# Altium PCB 大创第一版.pcbdoc
Units mil, origin at the board's own origin, x right, y up, seen from the top; angles counter-clockwise.
Board outline 6890 x 5845 mil, 2 copper layers (Top Layer, Bottom Layer); 17 components, 119 nets, 202 pads, 65 vias.
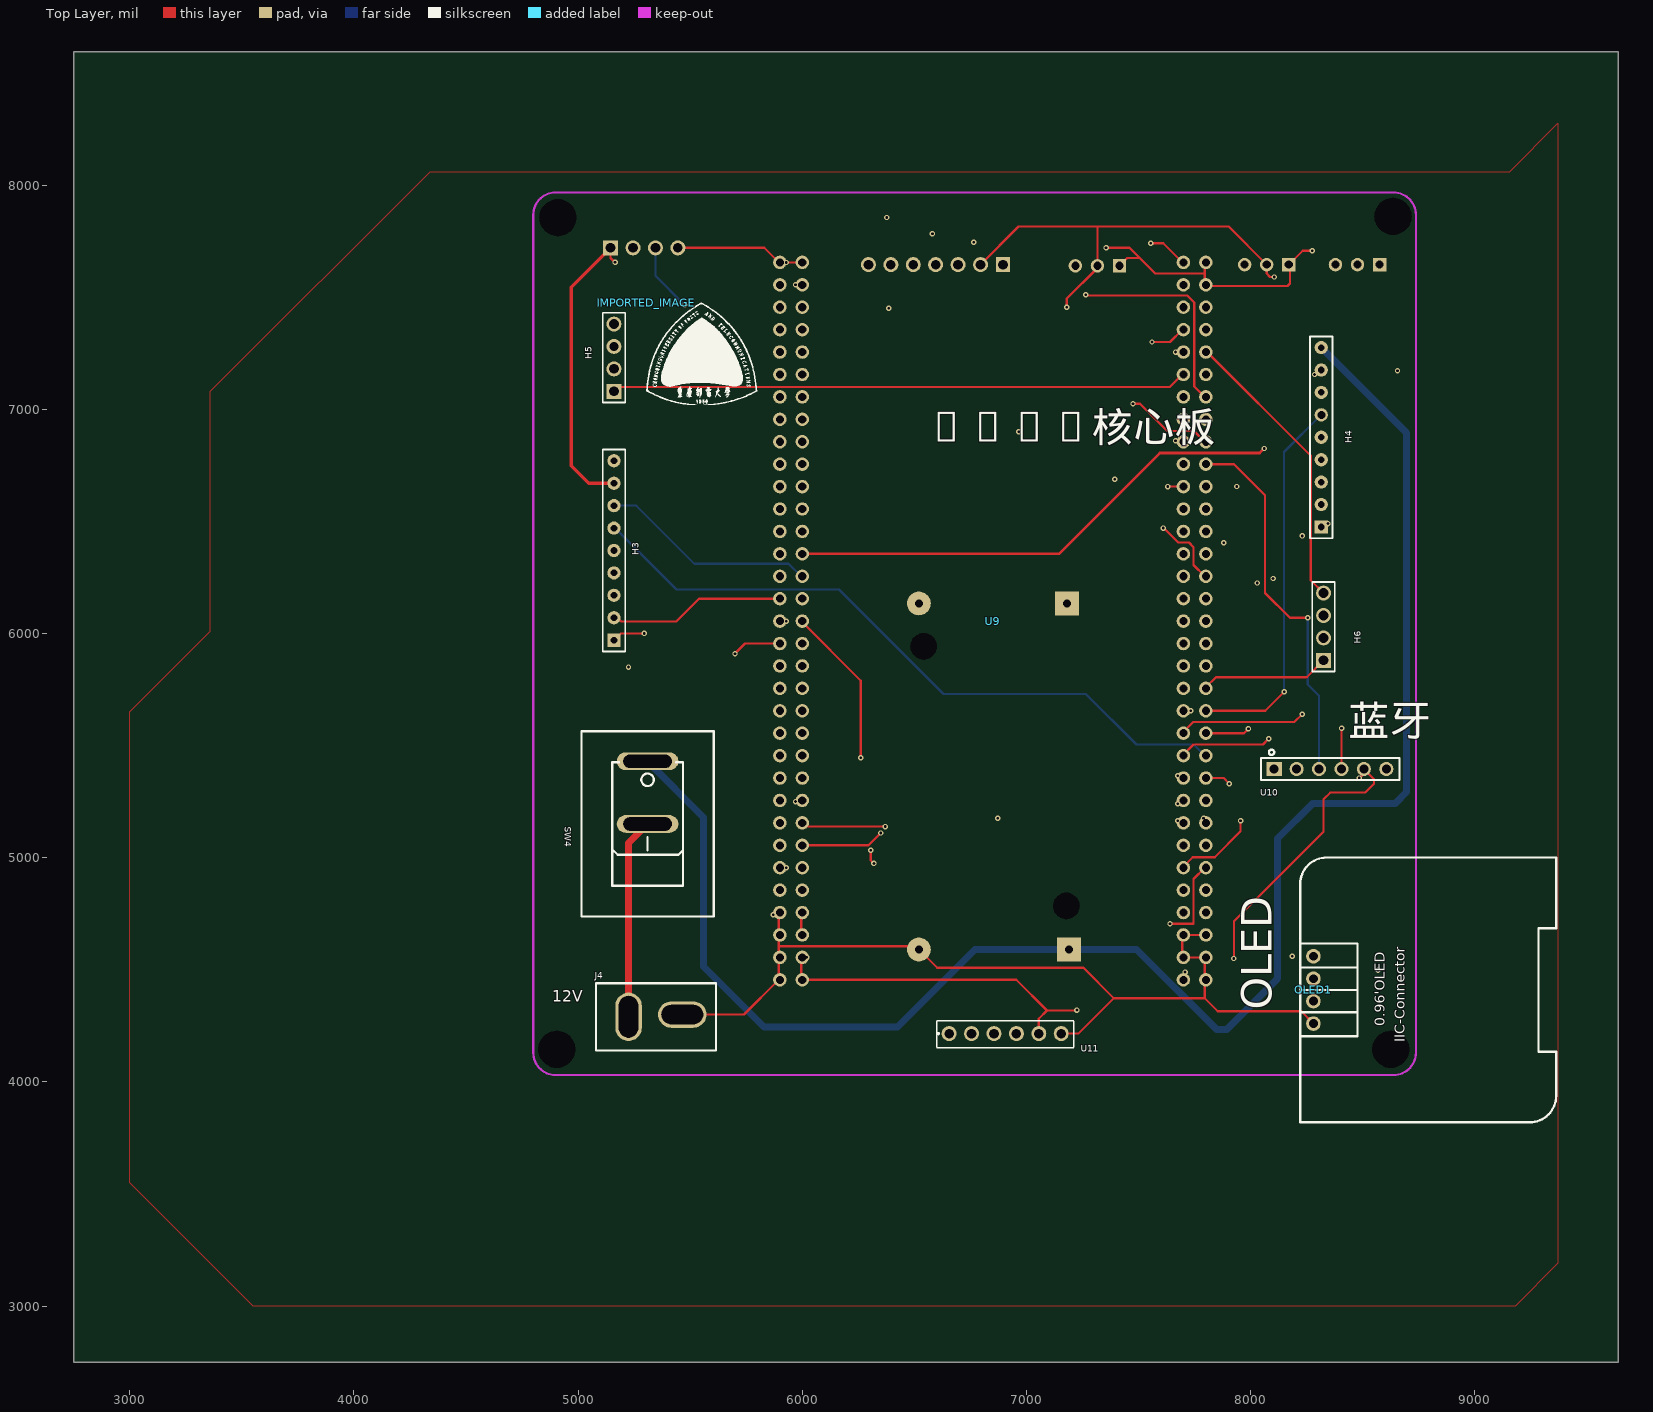
[diagram p0: Top Layer view]
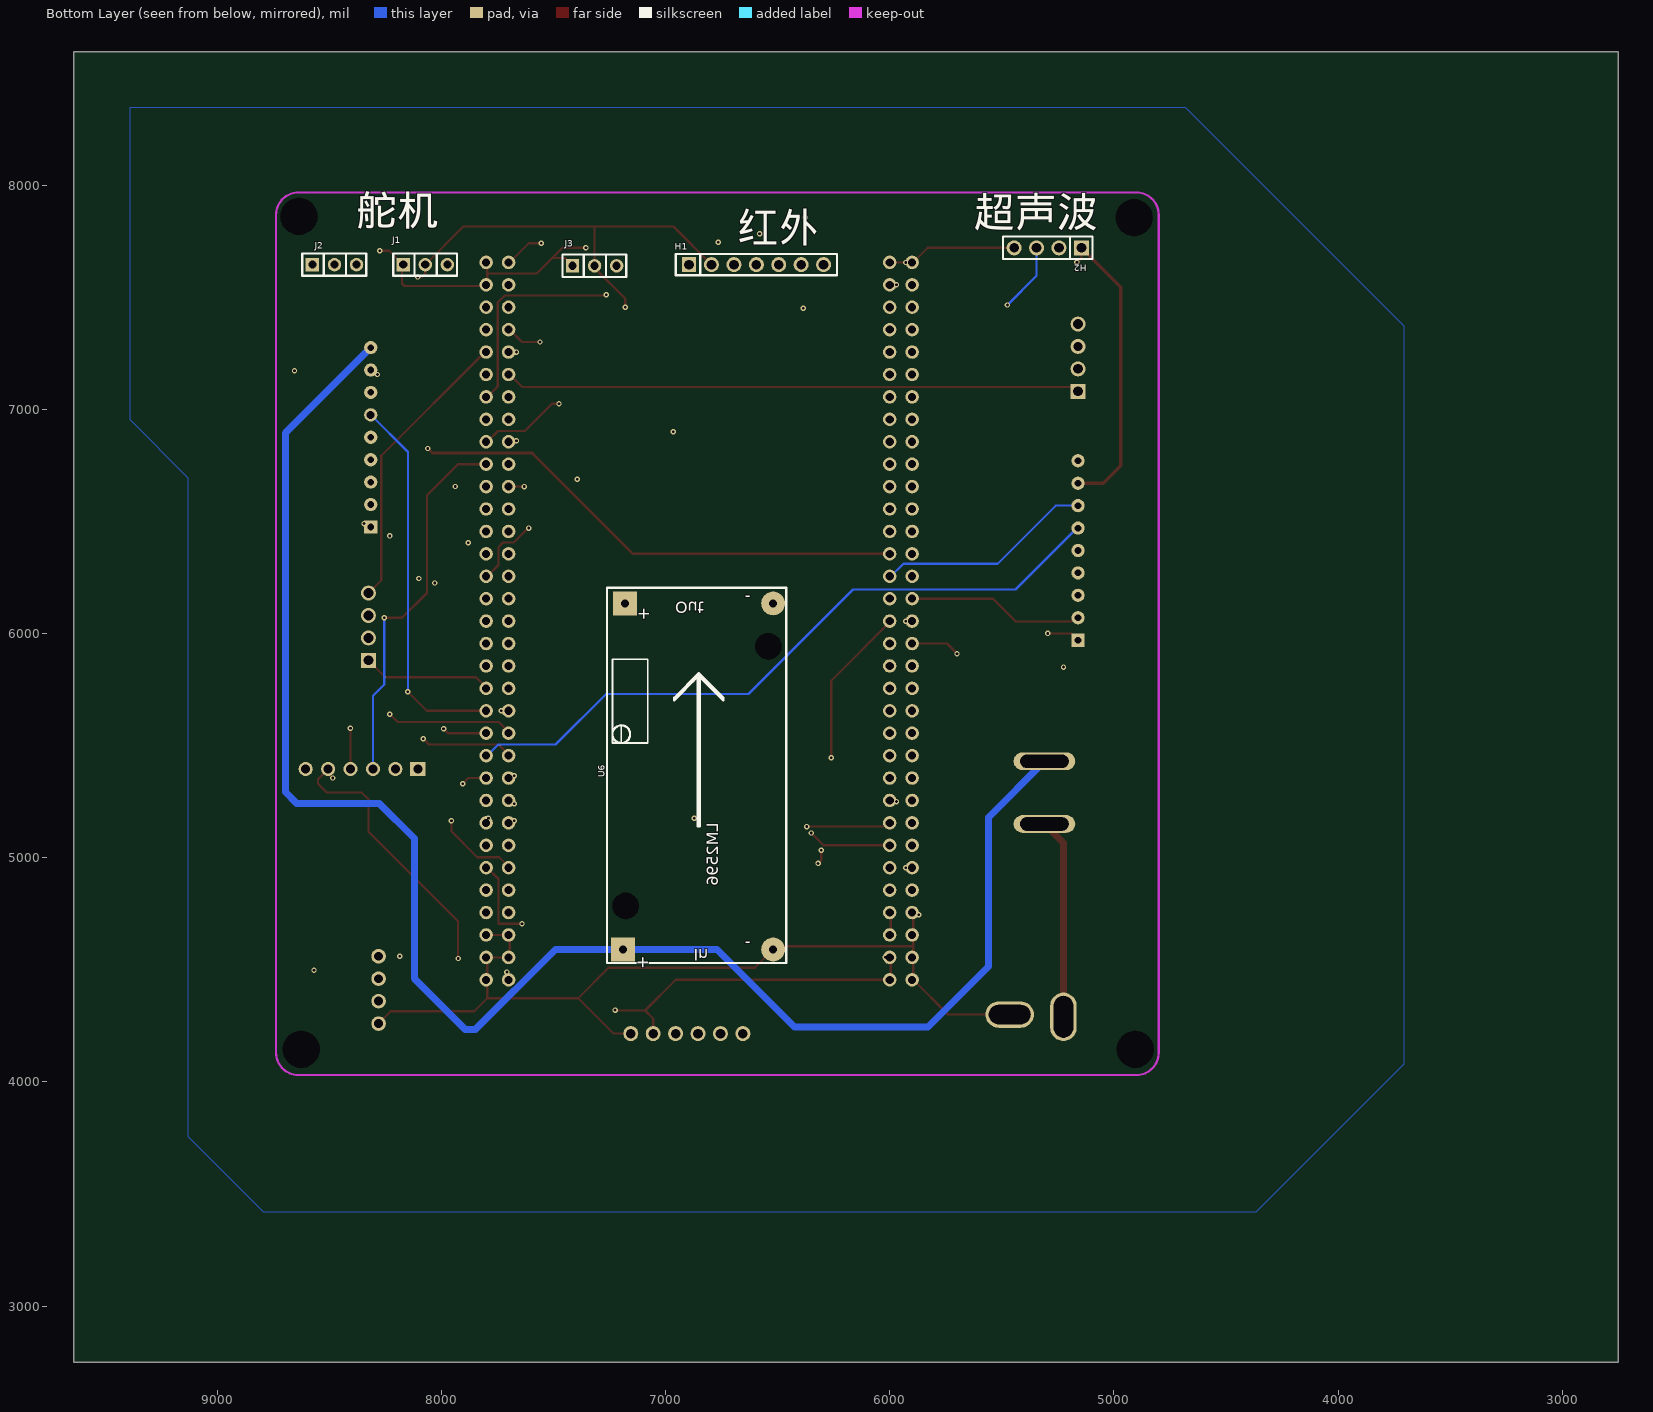
[diagram p1: Bottom Layer view, seen from below]

## Layer stack, top to bottom
Top Layer: signal copper (thickness not stored)
Dielectric: dielectric 12.6, FR-4, Dk 4.8
Bottom Layer: signal copper (thickness not stored)

## Board outline
9640,2750 2750,2750 2750,8595 9640,8595
cut-out: 4992.68,7855 ccw(c4910,7855) 4827.32,7855 ccw(c4910,7855)
cut-out: 8717.68,7860 ccw(c8635,7860) 8552.32,7860 ccw(c8635,7860)
cut-out: 8707.68,4145 ccw(c8625,4145) 8542.32,4145 ccw(c8625,4145)
cut-out: 4987.68,4145 ccw(c4905,4145) 4822.32,4145 ccw(c4905,4145)

## Components (designator, comment, footprint, x,y, rotation, side; value= is the part's Value field where it differs from the comment)
H1 "={Manufacturer Part}" HDR-TH_7P-P2.54-V-F 6595,7645 r180 bottom
H2 "={Manufacturer Part}" HDR-TH_4P-P2.54-V-M 5295,7720 r0 bottom
H3 "排针9P-2.54MM直插" 排针2.54MM9P 5160,5970 r90 top
H4 "排针9P-2.54MM直插" 排针2.54mm9p 8315,6475 r90 top
H5 "排针2" hdr-th_4p-p2.54-v-m-1 5160,7230 r90 top
H6 "排针2" HDR-TH_4P-P2.54-V-M-1 8325,6030 r90 top
IMPORTED_IMAGE "IMPORTED_IMAGE" IMPORTED_IMAGE 5305,7475 r0 top
J1 "3排针" 3排针 8170,7645 r180 bottom
J2 "3排针" 3排针 8575,7645 r180 bottom
J3 "3排针" 3排针 7415,7640 r180 bottom
J4 "T型插头" T型插头 5225,4290 r0 top
OLED1 "0.96OLED_4P_MODULE_JX" 0.96OLED_4P 8280,4410 r90 top
SW4 "={Manufacturer Part}" SW-TH_MR1-110-C5N-BBAA 5310,5290 r270 top
U6 "LM2596" LM2596 6520,4590 r90 bottom
U9 "ZET6核心板" ZET6封装-2 5450,4315 r0 top
U10 "={Manufacturer Part}" HDR-TH_6P-P2.54-V-F 8355,5395 r0 top
U11 "排针1*6" 排针1*6p 6655,4215 r0 top

## Footprints (in the part's own frame and the unit in brackets; to place one, negate y for a bottom-side part, rotate by r counter-clockwise, add the part's x,y. Pads: shape width x height; smd on the part's side, far side on the other; paste and mask are expansions set on the pad)
0.96OLED_4P [mm]
  round 1.65 hole 1 copper offset 0,0 paste+0 mask+0.051: 1(-3.81,-0.001) 2(-1.27,0.001) 3(1.27,0.001) 4(3.81,0.001)
  silkscreen extent -15,-27.5 15,1.5
3排针 [mil]
  rect 60x60 hole 36 mask+2: 1(0,0)
  round 60 hole 36 mask+2: 2(98.43,0) 3(196.85,0)
  silkscreen extent -45,-50 240,50
HDR-TH_4P-P2.54-V-M [mm]
  rect 1.7x1.7 hole 1.1 paste+0 mask+0.051: 1(-3.81,0)
  round 1.7 hole 1.1 paste+0 mask+0.051: 2(-1.27,0) 3(1.27,0) 4(3.81,0)
  silkscreen extent -5.08,-1.27 5.08,1.27
hdr-th_4p-p2.54-v-m-1 [mm]
  rect 1.7x1.7 hole 1.1 paste+0 mask+0.051: 1(-3.81,0)
  round 1.7 hole 1.1 paste+0 mask+0.051: 2(-1.27,0) 4(3.81,0)
  round 1.7 hole 1.02 paste+0 mask+0.051: 3(1.27,0)
  silkscreen extent -5.08,-1.27 5.08,1.27
HDR-TH_4P-P2.54-V-M-1 [mm]
  rect 1.7x1.7 hole 1.1 paste+0 mask+0.051: 1(-3.81,0)
  round 1.7 hole 1.1 paste+0 mask+0.051: 2(-1.27,0) 3(1.27,0) 4(3.81,0)
  silkscreen extent -5.08,-1.27 5.08,1.27
HDR-TH_6P-P2.54-V-F [mm]
  rect 1.8x1.6 hole 1.02 paste+0 mask+0.051: 1(-6.35,0)
  round 1.6 hole 1.02 paste+0 mask+0.051: 2(-3.81,0) 3(-1.27,0) 4(1.27,0) 5(3.81,0) 6(6.35,0)
  silkscreen extent -7.85,-1.25 7.85,2.2
HDR-TH_7P-P2.54-V-F [mm]
  rect 1.575x1.7 hole 1.1 paste+0 mask+0.051: 1(-7.62,0)
  round 1.7 hole 1.1 paste+0 mask+0.051: 2(-5.08,0) 3(-2.54,0) 4(0,0) 5(2.54,0) 6(5.08,0) 7(7.62,0)
  silkscreen extent -9.13,-1.2 9.13,1.2
IMPORTED_IMAGE [mil]
  silkscreen extent 0,-455 493,0
LM2596 [mil]
  rect 106.3x106.3 hole 35.8 paste+4 mask+4: 1(0.3,669.3) 3(1543.8,661.4)
  round 106.3 hole 35.8 paste+4 mask+4: 2(0.2,0) 4(1543.9,0.1)
  Multi-Layer board cut-out: 194.7,716.8 220.34,710.95 240.91,694.55 252.32,670.85 252.32,644.55 240.91,620.85 220.34,604.45 194.7,598.6 194.7,598.6 169.06,604.45 148.49,620.85 137.08,644.55 137.08,670.85 148.49,694.55 169.06,710.95 194.7,716.8
  Multi-Layer board cut-out: 1352.6,80.5 1378.24,74.65 1398.81,58.25 1410.22,34.55 1410.22,8.25 1398.81,-15.45 1378.24,-31.85 1352.6,-37.7 1352.6,-37.7 1326.96,-31.85 1306.39,-15.45 1294.98,8.25 1294.98,34.55 1306.39,58.25 1326.96,74.65 1352.6,80.5
  silkscreen extent -60,-59 1614,741
SW-TH_MR1-110-C5N-BBAA [mm]
  oval 2x7 hole 1.5 slot 5.5 at 90 deg paste+0 mask+0.051: 1(-3.55,0) 2(3.55,0)
  silkscreen extent -6.95,-7.5 14.05,7.5
T型插头 [mil]
  oval 117.99x215.98 hole 85.98 slot 185.98 at 90 deg paste+0 mask+2: 1(0,0)
  oval 215.98x117.99 hole 85.98 slot 185.98 at 0 deg paste+0 mask+2: 2(240,10)
  silkscreen extent -145,-150 390,150
ZET6封装-2 [mil]
  round 60 hole 36 mask+2: 1(550,3340) 2(550,3240) 3(550,3140) 4(550,3040) 5(550,2940) 6(550,2840) 7(550,2740) 8(550,2640) 9(550,2540) 10(550,2440) 11(550,2340) 12(550,2240) 13(550,2140) 14(550,2040) 15(550,1940) 16(550,1840) 17(550,1740) 18(550,1640) 19(550,1540) 20(550,1440) 21(550,1340) 22(550,1240) 23(550,1140) 24(550,1040) 25(550,940) 26(550,840) 27(550,740) 28(550,640) 29(550,540) 30(550,440) 31(550,340) 32(550,240) 33(550,140) 34(2250,140) 35(2250,240) 36(2250,340) 37(2250,440) 38(2250,540) 39(2250,640) 40(2250,740) 41(2250,840) 42(2250,940) 43(2250,1040) 44(2250,1140) 45(2250,1240) 46(2250,1340) 47(2250,1440) 48(2250,1540) 49(2250,1640) 50(2250,1740) 51(2250,1840) 52(2250,1940) 53(2250,2040) 54(2250,2140) 55(2250,2240) 56(2250,2340) 57(2250,2440) 58(2250,2540) 59(2250,2640) 60(2250,2740) 61(2250,2840) 62(2250,2940) 63(2250,3040) 64(2250,3140) 65(2250,3240) 66(2250,3340) 67(2350,140) 68(2350,240) 69(2350,340) 70(2350,440) 71(2350,540) 72(2350,640) 73(2350,740) 74(2350,840) 75(2350,940) 76(2350,1040) 77(2350,1140) 78(2350,1240) 79(2350,1340) 80(2350,1440) 81(2350,1540) 82(2350,1640) 83(2350,1740) 84(2350,1840) 85(2350,1940) 86(2350,2040) 87(2350,2140) 88(2350,2240) 89(2350,2340) 90(2350,2440) 91(2350,2540) 92(2350,2640) 93(2350,2740) 94(2350,2840) 95(2350,2940) 96(2350,3040) 97(2350,3140) 98(2350,3240) 99(2350,3340) 100(450,3340) 101(450,3240) 102(450,3140) 103(450,3040) 104(450,2940) 105(450,2840) 106(450,2740) 107(450,2640) 108(450,2540) 109(450,2440) 110(450,2340) 111(450,2240) 112(450,2140) 113(450,2040) 114(450,1940) 115(450,1840) 116(450,1740) 117(450,1640) 118(450,1540) 119(450,1440) 120(450,1340) 121(450,1240) 122(450,1140) 123(450,1040) 124(450,940) 125(450,840) 126(450,740) 127(450,640) 128(450,540) 129(450,440) 130(450,340) 131(450,240) 132(450,140)
排针1*6p [mm]
  round 1.7 hole 1.1 paste+0 mask+0.051: 1(0,0) 2(2.54,0) 3(5.08,0) 4(7.62,0) 5(10.16,0) 6(12.7,0)
  silkscreen extent -1.42,-1.6 14.1,1.47
排针2.54MM9P [mm]
  rect 1.5x1.5 hole 0.75 paste+0 mask+0.102: 1(0,0)
  round 1.5 hole 0.75 paste+0 mask+0.102: 2(2.54,0) 3(5.08,0) 4(7.62,0) 5(10.16,0) 6(12.7,0) 7(15.24,0) 8(17.78,0) 9(20.32,0)
  silkscreen extent -1.27,-1.27 21.59,1.27
排针2.54mm9p [mm]
  rect 1.5x1.5 hole 0.75 paste+0 mask+0.102: 1(0,0)
  round 1.5 hole 0.75 paste+0 mask+0.102: 2(2.54,0) 3(5.08,0) 4(7.62,0) 5(10.16,0) 7(15.24,0) 8(17.78,0) 9(20.32,0)
  round 1.5 hole 0.9 paste+0 mask+0.102: 6(12.7,0)
  silkscreen extent -1.27,-1.27 21.59,1.27

## Via types
v1: diameter 24.02, hole 12.01, Top Layer to Bottom Layer, 65 vias

## Nets (pads, with @x,y where several pads share a name; then routed paths per layer and width w, separated by ;. In a path a pad name is that pad's centre, name@x,y a point inside that pad or via, vN(x,y) a via of type N, cw(c..) or ccw(c..) an arc to the next point about the centre after c; other vN are vias at no path point)
3.3V: OLED1.2 U9.30 U9.31 U9.32 U9.33 U9.66 U11.5 | length 6547.5
  Top Layer w10: U9.32@5995,4555 5995,4455.1 6954.6,4455.1 7091.74,4317.95 ; U9.31@5995,4655.1 U9.30@5995,4755.1 ; U11.5 7055,4281.21 7091.74,4317.95 ; v1(7225,4320) 7222.95,4317.95 7091.74,4317.95 ; v1(7555,7740) 7610.1,7740 U9.66@7695,7655.1
  Top Layer w11.81: U9.32 v1(6020,4555)
  Top Layer w31.5: U9.32@5995,4555 U9.32
  Inner1 w10: U9.31@6000,4660.1 6000,4575 v1(6020,4555) ; v1(7225,4320) 7349.52,4444.52 7349.52,7331.22 7461.25,7442.95 7461.25,7646.25 v1(7555,7740)
  Inner2 w10: v1(7225,4320) 7265,4360 OLED1.2
12V: H3.9 H4.9 SW4.1 U6.1 | length 9088.5
  Inner1 w31.5: H3.9 5150,6760 5104.26,6760 4969.14,6624.89 4969.14,5770.62 SW4.1
  Bottom Layer w31.5: SW4.1 5560,5179.77 5560,4515 5830,4245 6425,4245 6770.3,4590.3 U6.1 7491.52,4590.3 7848.64,4233.18 7893.18,4233.18 8120,4460 8120,5085 8277.03,5242.03 8645,5242.03 8695,5292.03 8695,6895 H4.9
$1N14314: J4.1 SW4.2 | length 895.4
  Top Layer w31.5: J4.1 5225,5065.24 SW4.2
GND: H1.1 H2.4 H3.1 H4.1 J1.1 J2.1 J3.1 J4.2 OLED1.1 U6.2 U6.4 U9.1 U9.35 U9.36 U9.67 U9.68 U9.69 U9.98 U9.99 U9.100 U9.129 U9.130 U9.131 U9.132 U10.4 U11.6 | length 14499.7
  Top Layer w10: H3.1 5190,6000 v1(5295,6000) ; H2.4 5830.1,7720 5895,7655.1 U9.100@5929.14,7655.1 ; J4.2 5739.9,4300 5895,4455.1 5895,4555.1 5895,4604.66 ; v1(5870,4745) 5885.34,4745 U9.129@5895,4754.66 ; U9.129@5895,4755.1 U9.129@5895,4754.66 ; v1(5929.14,7654.66) U9.100@5929.14,7655.1 ; U9.1@5995,7655.1 U9.100@5929.14,7655.1 ; U11.6 7231.53,4215 7389.53,4373 ; v1(7355,7720) 7459.57,7720 7505.46,7674.11 ; J3.1 7449.11,7674.11 7505.46,7674.11 ; U9.69@7795,4655.1 7695,4655.1 7695,4555.1 7795,4555.1 7795,4455.1 7795,4373 ; U9.99@7795,7655.1 7795,7605.54 ; v1(8274.07,7707.19) 8232.19,7707.19 J1.1 8170,7630.86 8175,7625.86 8175,7561.13 8164.03,7550.16 7799.94,7550.16 7795,7555.1 7795,7605.54 ; OLED1.1@8280.05,4260 8225.35,4314.7 7853.3,4314.7 7795,4373 ; H4.1 8330,6490 v1(8345,6490) ; U10.4 8405,5576.75 v1(8405.46,5577.21) ; 5895,4604.66 6505.54,4604.66 U6.2 6601.84,4508.36 7254.18,4508.36 7389.53,4373 ; 5895,4604.66 5895,4655.1 U9.129@5895,4754.66 ; 7389.53,4373 7795,4373 ; 7505.46,7674.11 7574.03,7605.54 7795,7605.54
  Inner1 w9.84: OLED1.1@8280.05,4260 8305,4260 8440,4395 8440,5360 U10.4
  Inner1 w10: v1(5295,6000) 5295,5665.18 5631.01,5329.17 5631.01,4838.99 5725,4745 v1(5870,4745) ; H4.1 8405.46,6384.54 v1(8405.46,5577.21) ; v1(8345,6490) 8345,6493.16 8575,6723.16 J2.1
  Inner2 w10: v1(5295,6000) 5399.66,6104.66 6490.86,6104.66 U6.4 ; v1(5929.14,7654.66) 5929.14,7667.53 5973.72,7712.11 6877.8,7712.11 6895,7694.92 6895,7692.11 ; H1.1 6895,7692.11 ; v1(7355,7720) 7352.89,7722.11 6925,7722.11 6895,7692.11 ; v1(8274.07,7707.19) 8512.81,7707.19 J2.1
PA0: H4.7 U9.14 | length 2613.2
  Top Layer w11.81: U9.14 7145,6355 7595,6805 8040,6805 v1(8060,6825)
  Inner1 w11.81: v1(8060,6825) 8065,6825 H4.7
PA1: H4.2 U9.114 | length 2614
  Inner1 w10: v1(7880,6405) 7880.54,6405.54 7970.39,6405.54 8139.86,6575 H4.2
  Inner2 w10: U9.114@5895,6255.1 5928.78,6255.1 5929.14,6254.73 5951.45,6277.04 5951.45,6381.45 5974.66,6404.66 7879.66,6404.66 v1(7880,6405)
PA2: H3.7 U9.15 | length 965.4
  Bottom Layer w9.84: H3.7 5260,6570 5518.76,6311.24 5938.86,6311.24 U9.15@5995,6255.1
PA3: H3.2 U9.115 | length 783.7
  Top Layer w10: H3.2 5175.8,6070 5192.06,6053.74 5438.29,6053.74 5539.65,6155.1 U9.115@5895,6155.1
PA4: U9.16
PA5: U9.116 U11.1 | length 2320.7
  Top Layer w10: U9.116@5895,6055.1 5895.44,6054.66 v1(5929.14,6054.66) ; v1(6305.89,5033.48) 6305.89,4987.86 v1(6319.58,4974.17)
  Inner1 w10: v1(5929.14,6054.66) 5951.45,6032.36 5951.45,5538.55 5979.44,5510.56 6228.81,5510.56 6305.89,5433.48 v1(6305.89,5033.48)
  Inner2 w10: v1(6319.58,4974.17) 6319.58,4550.42 U11.1
PA6: U9.17 U11.4 | length 2355
  Top Layer w10: U9.17@5995,6055.1 6261.29,5788.81 v1(6261.29,5445.21)
  Inner1 w10: v1(6261.29,5445.21) 6261.29,4999.59 6407.89,4852.98 6608.15,4852.98 6955,4506.13 U11.4
PA7: U9.117 U11.3 | length 2510.1
  Top Layer w10: v1(5700,5910) 5745,5955 U9.117@5894.9,5955
  Inner1 w10: v1(5700,5910) 5700,5581.46 5876.8,5404.66 6013.2,5404.66 6242.7,5175.16 6242.7,4753.48 6709.19,4286.99 6783.01,4286.99 U11.3
PA8: U9.48
PA9: U9.82
PA10: U9.49
PA11: U9.83
PA12: U9.50
PA13: U9.84
PA14: U9.51
PA15: H5.2 U9.85 | length 3236.7
  Top Layer w10: v1(7610,6470) 7612.34,6470 7676.8,6405.54 7724.46,6405.54 7745,6385 7745,6305.1 U9.85@7795,6255.1
  Inner2 w10: H5.2 5441.67,7180 5617.01,7004.66 6065.34,7004.66 6108.55,6961.45 6108.55,6668.21 6306.76,6470 v1(7610,6470)
PB0: U9.19
PB1: U9.119
PB2: U9.20
PB3: H5.1 U9.61 | length 2566.1
  Top Layer w10: H5.1 5178.87,7098.87 7638.77,7098.87 U9.61@7695,7155.1
PB4: H6.4 U9.95 | length 1300.7
  Top Layer w10: U9.95@7795,7255.1 7805.34,7255.1 8268.29,6792.14 8268.29,6236.71 H6.4
PB5: H6.3 U9.62 | length 1789.2
  Top Layer w10: v1(7665,7255) 7665.1,7255.1 U9.62@7695,7255.1
  Inner1 w10: v1(7665,7255) 7612.12,7202.12 7612.12,6970.21 7676.8,6905.54 7813.2,6905.54 7937.45,6781.28 v1(7937.45,6655.54)
  Inner2 w10: v1(7937.45,6655.54) 7937.45,6221.78 8131.23,6028 8273,6028 H6.3
PB6: OLED1.3 U9.96 | length 3948.9
  Inner1 w10: v1(8568,4497.95) 8654.71,4584.65 v1(8654.71,7171.29)
  Inner2 w10: U9.96@7795,7355.1 8470.89,7355.1 v1(8654.71,7171.29) ; OLED1.3 8530.05,4460 v1(8568,4497.95)
PB7: OLED1.4 U9.63 | length 3366.6
  Top Layer w10: v1(7560,7300) 7639.9,7300 U9.63@7695,7355.1
  Inner1 w10: v1(7560,7300) 7517.75,7257.75 7517.75,5864.58 7676.8,5705.54 7813.2,5705.54 8016.48,5502.25 8016.48,4728.52 v1(8185,4560)
  Inner2 w10: v1(8185,4560) OLED1.4
PB8: U9.97
PB9: U9.64
PB10: U9.128
PB11: U9.29
PB12: U9.70
PB13: U9.37
PB14: U9.71
PB15: U9.38
PC0: U9.12
PC1: U9.112
PC2: U9.13
PC3: U9.113
PC4: U9.18
PC5: U9.118
PC6: H6.2 U9.46 | length 861.4
  Top Layer w10: U9.46@7695,5655.1 7695.44,5655.54 v1(7732.39,5655.54)
  Inner2 w10: v1(7732.39,5655.54) 7732.39,5661.13 7780.17,5708.9 8213.66,5708.9 8277.77,5773.01 8277.77,5932.77 H6.2
PC7: H6.1 U9.80 | length 579.8
  Top Layer w10: U9.80 7800,5760.1 7845,5805.1 8250.1,5805.1 H6.1
PC8: U9.47
PC9: U9.81
PC10: U9.52
PC11: U9.86
PC12: U9.53
PC13: U9.5
PC14: U9.105
PC15: U9.6
PD0: U9.87
PD1: U9.54
PD2: U9.88
PD3: U9.55
PD4: U9.89
PD5: U9.56 U10.2 | length 1913.5
  Top Layer w10: v1(7630,6655) 7630.1,6655.1 U9.56@7695,6655.1
  Inner1 w10: v1(7630,6655) 7570.89,6595.89 7570.89,6388.64 7663.55,6295.98 8177.95,6295.98 8187.95,6285.98 8187.95,5412.05 U10.2
PD6: U9.90 U10.3 | length 1694.8
  Top Layer w10: U9.90@7795,6755.1 7925.69,6755.1 8064.29,6616.5 8064.29,6180.71 8175,6070 v1(8255,6070)
  Bottom Layer w9.84: v1(8255,6070) 8255,5772.4 8305,5722.4 U10.3
PD7: U9.57
PD8: U9.72 U11.2 | length 1522.7
  Top Layer w10: v1(7640,4705) 7640.54,4705.54 7745,4705.54 7745,4905.1 U9.72@7795,4955.1
  Inner2 w10: U11.2 6755,4316.15 7143.85,4705 v1(7640,4705)
PD9: U9.39 U10.6 | length 1195.9
  Top Layer w10: U9.39@7695,4955.1 7742.11,5002.21 7839.87,5002.21 7955,5117.34 v1(7955,5165)
  Inner2 w10: v1(7955,5165) 8005,5215 8554.29,5215 8605,5265.71 U10.6
PD10: U9.73
PD11: U9.40
PD12: H5.4 U9.74 | length 4522.5
  Top Layer w10: v1(7790,5175) 7790,5160.1 U9.74@7795,5155.1
  Inner1 w10: v1(7393.39,6687.84) 7393.39,5582.19 7565.97,5409.62 7724.77,5409.62 7749.38,5385 7749.38,5215.62 v1(7790,5175)
  Inner2 w10: H5.4 5491.55,7380 5566.89,7304.66 6013.2,7304.66 6167.31,7150.55 6167.31,6791.57 6271.05,6687.84 v1(7393.39,6687.84)
PD13: H5.3 U9.41 | length 4270.5
  Top Layer w10: v1(7675,5165) 7684.9,5155.1 U9.41@7695,5155.1
  Inner1 w10: H5.3 5225.93,7214.07 5225.93,5850.93 v1(5225,5850)
  Inner2 w10: v1(5225,5850) 5570.34,5504.66 5945,5504.66 5945,5411.33 6244.11,5411.33 6262.59,5392.86 6443.62,5392.86 6635.36,5201.11 7041.27,5201.11 7041.6,5201.44 7343.65,5201.44 7380.09,5165 v1(7675,5165)
PD14: U9.75
PD15: H3.3 U9.42 | length 3034
  Top Layer w10: v1(7675,5240) 7679.9,5240 U9.42@7695,5255.1
  Inner2 w10: H3.3 5167.38,6170 5180,6157.38 5180,6129.96 5226.25,6083.71 5226.25,5963.75 5279.47,5910.53 5515.48,5910.53 5621.35,5804.66 6212.24,5804.66 6666.15,5350.75 6666.15,5314.54 6734.58,5246.11 7668.89,5246.11 v1(7675,5240)
PE0: U9.101
PE1: H2.2 U9.2 | length 818.4
  Top Layer w10: v1(5970,7555) 5994.9,7555 U9.2@5995,7555.1
  Inner1 w10: H2.2 5360.34,7604.66 5913.2,7604.66 5962.86,7555 v1(5970,7555)
PE2: U9.102
PE3: U9.3
PE4: U9.103
PE5: U9.4
PE6: U9.104
PE7: U9.24
PE8: U9.124
PE9: H2.3 U9.25 | length 2912.3
  Top Layer w10: v1(5970,5250) 5989.9,5250 U9.25@5995,5255.1
  Inner1 w10: v1(5475,7465) 5646.01,7293.99 5646.01,5599.5 5645.68,5599.17 5645.68,5372.1 5813.12,5204.66 5924.66,5204.66 v1(5970,5250)
  Bottom Layer w10: H2.3 5345,7595 v1(5475,7465)
PE10: U9.125
PE11: J1.3 U9.26 | length 4562.6
  Top Layer w10: U9.26@5995,5155.1 6011.68,5138.42 v1(6369.95,5138.42)
  Inner1 w10: v1(6369.95,5138.42) 6369.95,6812.13 6544.51,6986.7 6544.51,7746.4 v1(6580.52,7782.41)
  Inner2 w10: v1(6580.52,7782.41) 7835.74,7782.41 J1.3
PE12: U9.126
PE13: J2.3 U9.27 | length 5220.3
  Top Layer w9.84: U9.27 6295,5055 v1(6350,5110)
  Inner1 w10: v1(6350,5110) 6346.96,5113.04 6346.96,7825.95 v1(6376.16,7855.15)
  Inner2 w10: v1(6376.16,7855.15) 8093.25,7855.15 8303.4,7645 J2.3
PE14: J3.3 U9.127 | length 3769.8
  Top Layer w10: U9.127@5895,4955.1 5895.44,4954.66 v1(5929.14,4954.66)
  Inner1 w10: v1(6871.29,5175.59) 7305.86,5610.16 7305.86,7520.48 7218.15,7608.19 J3.3
  Inner2 w10: v1(5929.14,4954.66) 5929.14,4957.01 5976.8,5004.66 6336.61,5004.66 6336.61,5038.22 6370.17,5071.78 6767.48,5071.78 v1(6871.29,5175.59)
PE15: U9.28
PF0: U9.106
PF1: U9.7
PF2: U9.107
PF3: U9.8
PF4: U9.108
PF5: U9.9
PF6: U9.109
PF7: U9.10
PF8: U9.110
PF9: U9.11
PF10: U9.111
PF11: U9.120
PF12: U9.21
PF13: U9.121
PF14: U9.22
PF15: U9.122
PG0: U9.23
PG1: U9.123
PG2: H3.4 U9.76 | length 3692.4
  Top Layer w10: U9.76@7795,5355.1 7879.9,5355.1 v1(7905,5330)
  Inner2 w10: H3.4 5225,6270 5246.25,6248.75 5246.25,5993.75 5281.03,5958.97 5438.97,5958.97 5484.66,6004.66 6165.34,6004.66 6305.68,5864.32 6640.68,5864.32 6699.58,5805.42 6699.58,5426.7 6830.74,5295.54 7270.5,5295.54 7280.5,5305.54 7880.54,5305.54 v1(7905,5330)
PG3: H3.5 U9.43 | length 3046.9
  Top Layer w10: v1(7675,5365) 7685.1,5365 U9.43@7695,5355.1
  Inner2 w10: H3.5 5309.19,6370 5481.19,6197.99 6224.97,6197.99 6266.99,6240.02 6580.68,6240.02 6915.38,5905.32 6915.38,5808.53 7358.91,5365 v1(7675,5365)
PG4: H3.6 U9.77 | length 3055.4
  Bottom Layer w9.84: H3.6 5165,6470 5439.09,6195.91 6164.09,6195.91 6630,5730 7265,5730 7490.81,5504.19 7745.91,5504.19 U9.77@7795,5455.1
PG5: H4.3 U9.44 | length 1658.4
  Top Layer w10: U9.44@7695,5455.1 7744.9,5505 8055,5505 v1(8080,5530)
  Inner1 w10: v1(8080,5530) 8096.52,5546.52 8096.52,6241.52 v1(8100,6245)
  Inner2 w10: v1(8100,6245) 8100,6460 H4.3
PG6: H4.4 U9.78 | length 1537.9
  Top Layer w10: U9.78@7795,5555.1 7970.1,5555.1 v1(7990,5575)
  Inner1 w10: v1(7990,5575) 8025,5610 8025,6220 v1(8030,6225)
  Inner2 w10: v1(8030,6225) 8030,6490 H4.4
PG7: H4.5 U9.45 | length 1920.5
  Top Layer w10: U9.45@7695,5555.1 7745.44,5605.54 8195.54,5605.54 v1(8230,5640)
  Inner1 w10: v1(8230,5640) 8222.01,5647.99 8222.01,6427.01 v1(8230,6435)
  Inner2 w10: v1(8230,6435) 8230,6557.69 8294.23,6621.92 8338.76,6621.92 8372.23,6655.39 8372.23,6817.77 H4.5
PG8: H4.6 U9.79 | length 1694.3
  Top Layer w10: U9.79@7795,5655.1 8065.1,5655.1 v1(8150,5740)
  Bottom Layer w10: v1(8150,5740) 8149.04,5740.96 8149.04,6809.04 H4.6
PG9: H1.7 U9.91 | length 1827.2
  Top Layer w10: v1(7475,7025) 7505.9,7025 7628,6902.9 7747.2,6902.9 U9.91@7795,6855.1
  Inner2 w10: H1.7 6915,7025 v1(7475,7025)
PG10: H1.6 U9.58 | length 1777.1
  Top Layer w10: v1(7665,6860) 7669.9,6855.1 U9.58@7695,6855.1
  Inner1 w9.84: v1(6385,7450) 6385,7635 H1.6
  Inner2 w10: v1(6385,7450) 6385,7413.25 6938.25,6860 v1(7665,6860)
PG11: H1.5 U9.92 | length 2171.2
  Inner1 w10: H1.5 6495,7729.76 6584.18,7818.94 7599.8,7818.94 7748.55,7670.19 7748.55,7001.55 U9.92@7795,6955.1
PG12: H1.4 U9.59 | length 1663.1
  Inner1 w10: H1.4 6595,7270 v1(6965,6900)
  Inner2 w11.81: v1(6965,6900) 7645,6900 U9.59@7705,6960
PG13: H1.3 U9.93 | length 1564
  Top Layer w10: v1(7265,7510) 7267.55,7507.45 7717.55,7507.45 7748.55,7476.45 7748.55,7101.55 U9.93@7795,7055.1
  Inner1 w10: H1.3 6830,7510 v1(7265,7510)
PG14: U9.60
PG15: U9.94
VBAT: U9.65
VCC: H1.2 H2.1 H3.8 H4.8 J1.2 J2.2 J3.2 U6.3 U9.34 U10.5 | length 10587.6
  Top Layer w9.84: v1(7925,4550) 7925,4715 8325,5115 8325,5260 8355,5290 8510,5290 8550,5330 8550,5350 U10.5
  Top Layer w10: H2.1 5145,7675 v1(5165,7655) ; H1.2 6964.6,7814.6 7316.57,7814.6 ; v1(7180,7455) 7180,7493.8 7316.57,7630.38 J3.2 7316.57,7814.6 ; U9.34@7695,4455.1 7707.39,4467.49 v1(7707.39,4489.48) ; v1(8105,7590) 8086.57,7590 8071.57,7605 J1.2 7901.98,7814.6 7316.57,7814.6 ; v1(8285,7155) 8305,7175 H4.8 ; v1(8485,5355) 8505,5375 U10.5
  Top Layer w15.75: H2.1 4969.14,7544.14 4969.14,6748.11 5047.25,6670 H3.8
  Inner1 w10: v1(6765,7745) 6795,7715 H1.2 ; v1(7180,7455) 7181.4,7453.6 U6.3 ; J1.2 8071.57,7368.43 v1(8285,7155)
  Inner2 w9.84: v1(7707.39,4489.48) 7723.81,4505.91 7880.91,4505.91 v1(7925,4550)
  Inner2 w10: v1(5165,7655) 5622,7655 5713.67,7746.67 6763.33,7746.67 v1(6765,7745) ; U6.3 7181.4,6100.94 7676.8,5605.54 8084.33,5605.54 8255.46,5434.41 8255.46,5373.84 8304.3,5325 8455,5325 v1(8485,5355) ; v1(8105,7590) 8421.57,7590 J2.2
"": U10.1

## Polygon pours and split planes (outlines as drawn)
GND on Top Layer (solid, remove dead copper, pour order 0): 4340,8060 9155,8060 9370,8275 9370,3190 9180,3000 3550,3000 3000,3550 3000,5650 3360,6010 3360,7080
GND on Bottom Layer (solid, remove dead copper, pour order 1): 4680,8345 9390,8345 9390,6955 9130,6695 9130,3756.24 8793.76,3420 4365,3420 3705,4080 3705,7370

## Keep-outs
Board Outline Layer:
  lines w10 net "": 4800,4130 ccw(c4900,4130) 4900,4030 8637.01,4030 ccw(c8637.01,4130) 8737.01,4130 8737.01,7867.01 ccw(c8637.01,7867.01) 8637.01,7967.01 4900,7967.01 ccw(c4900,7867.01) 4800,7867.01 4800,4130

## Silkscreen, mask and mechanical layers (free items; w line width, h text height)
Top Silkscreen Layer:
  text "蓝牙" at 8434.82,5545.08 h135.94
  text "12V" at 4885.64,4357.48 h51.1
  text "OLED" at 8094.92,4320.49 h135.94 r90
Bottom Silkscreen Layer:
  text "舵机" at 8379.82,7820.08 h135.94
  text "超声波" at 5625.16,7815.08 h135.94
  text "红外" at 6679.82,7745.08 h135.94
Mechanical Layer:
  circle w1 net "": c4910,7855 r82.68
  circle w1 net "": c8635,7860 r82.68
  circle w1 net "": c8625,4145 r82.68
  circle w1 net "": c4905,4145 r82.68

## Text inside footprints (layer, text, board x,y; h text height)
OLED1: Top Silkscreen Layer "IIC-Connector" at 8686.61,4176.76 h45.21 r90; Top Silkscreen Layer "0.96'OLED" at 8598.12,4248.13 h45.21 r90
U6: Bottom Silkscreen Layer "+" at 7072.19,6116 h52.3 r270; Bottom Silkscreen Layer "+" at 7076.59,4562.4 h52.3 r270; Bottom Silkscreen Layer "-" at 6619.7,4601.61 h52.3; Bottom Silkscreen Layer "-" at 6619.7,6145.25 h52.3; Bottom Silkscreen Layer "In" at 6873.85,4591.43 h51.92 r180; Bottom Silkscreen Layer "Out" at 6956.97,6141.43 h51.92 r180